# Altium PCB Driver.PcbDoc
Units mil, origin at the board's own origin, x right, y up, seen from the top; angles counter-clockwise.
Board outline 3937.01 x 3937.01 mil, 2 copper layers (Top Layer, Bottom Layer); 110 components, 78 nets, 353 pads, 36 vias.
Unrouted connection lines stored in the file: 162.
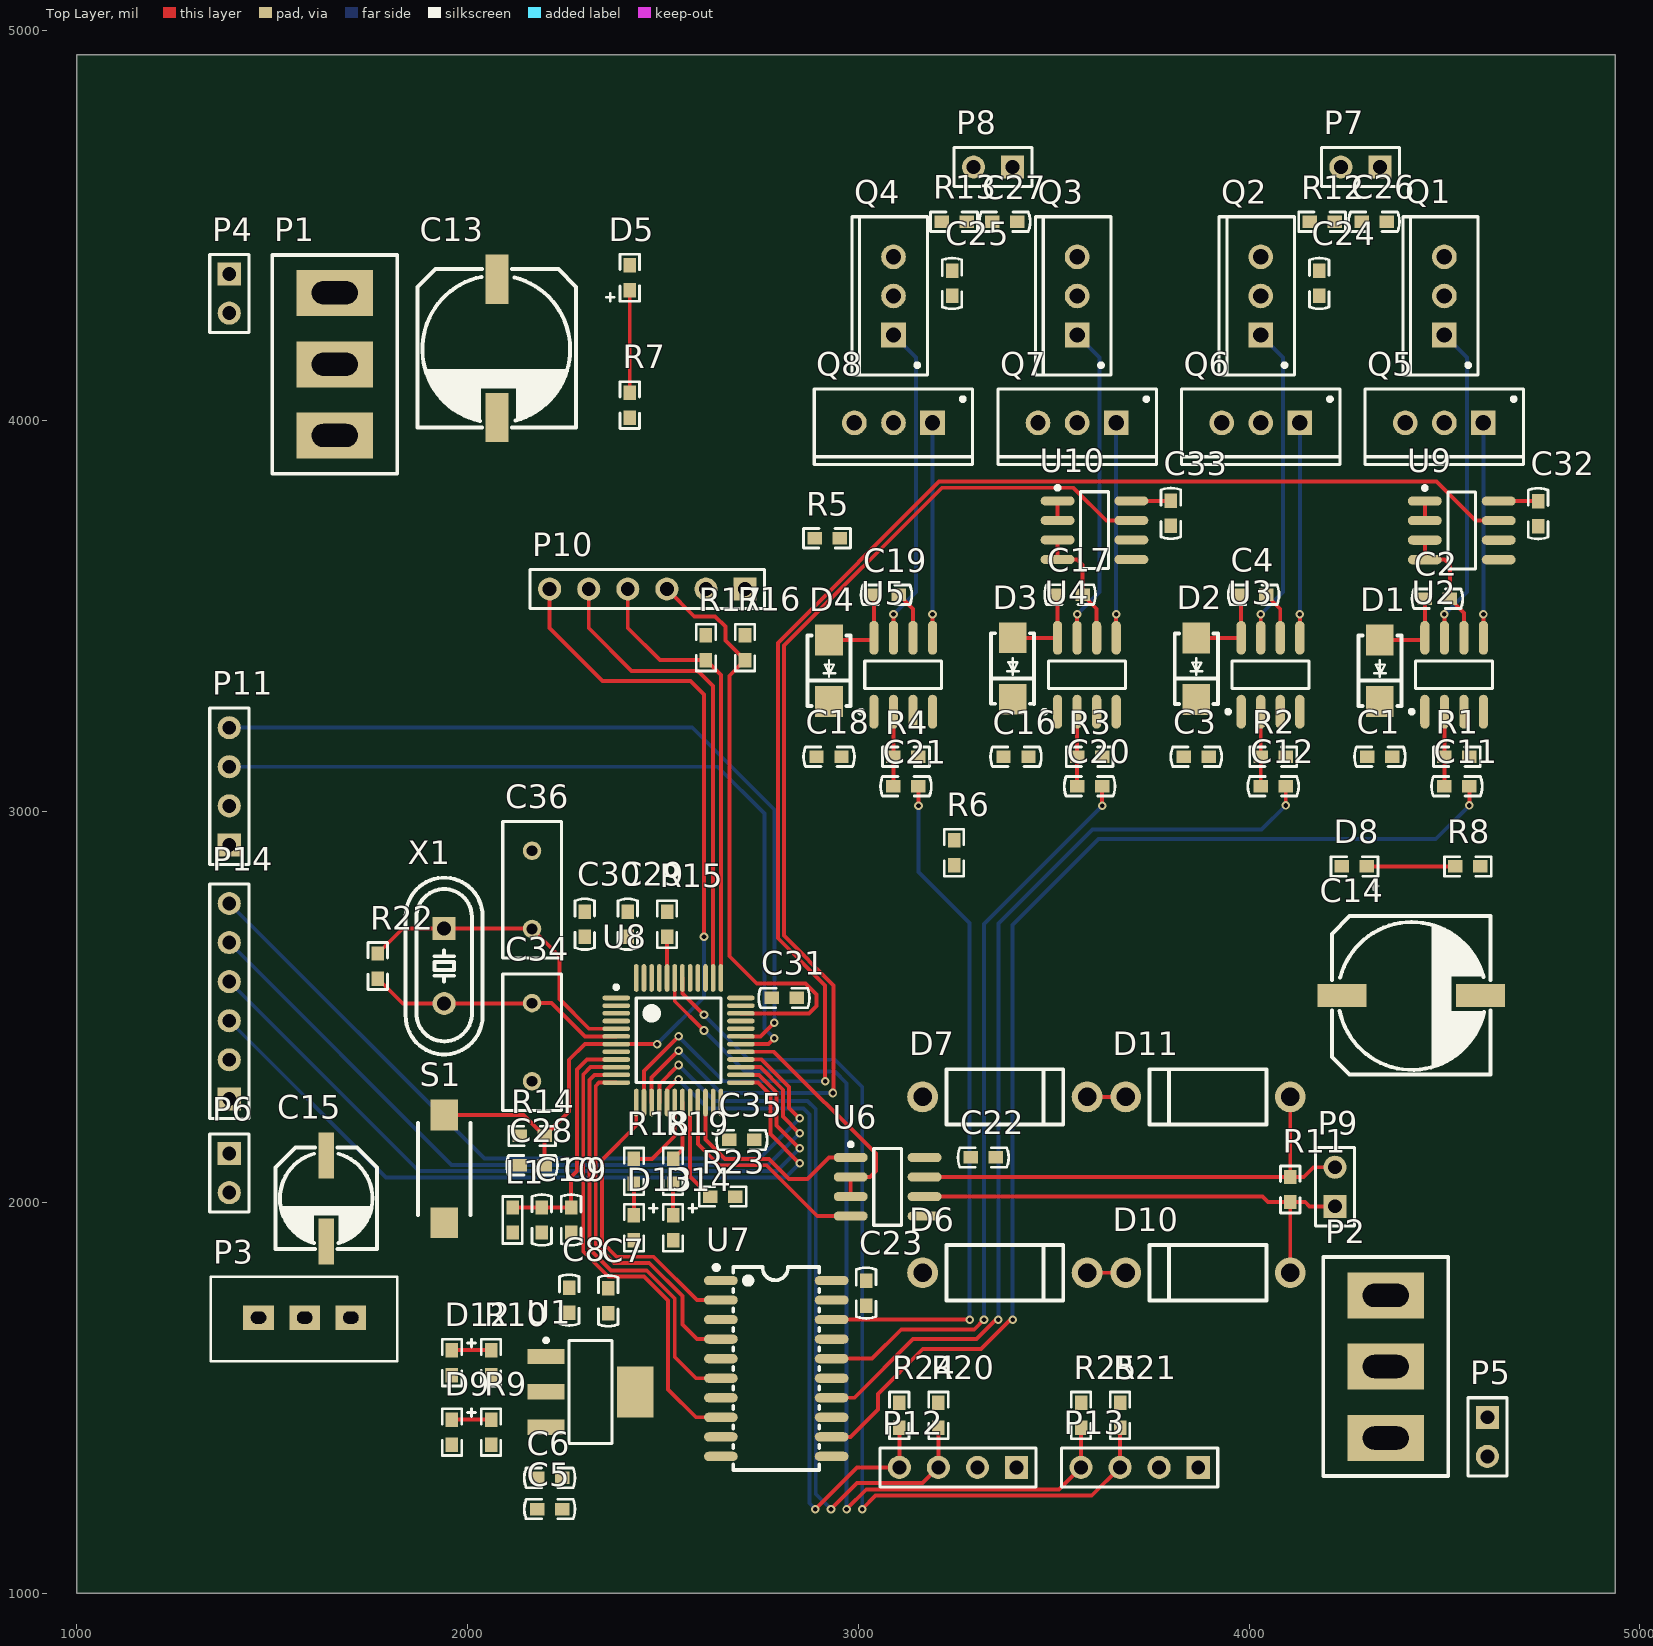
[diagram p0: Top Layer view]
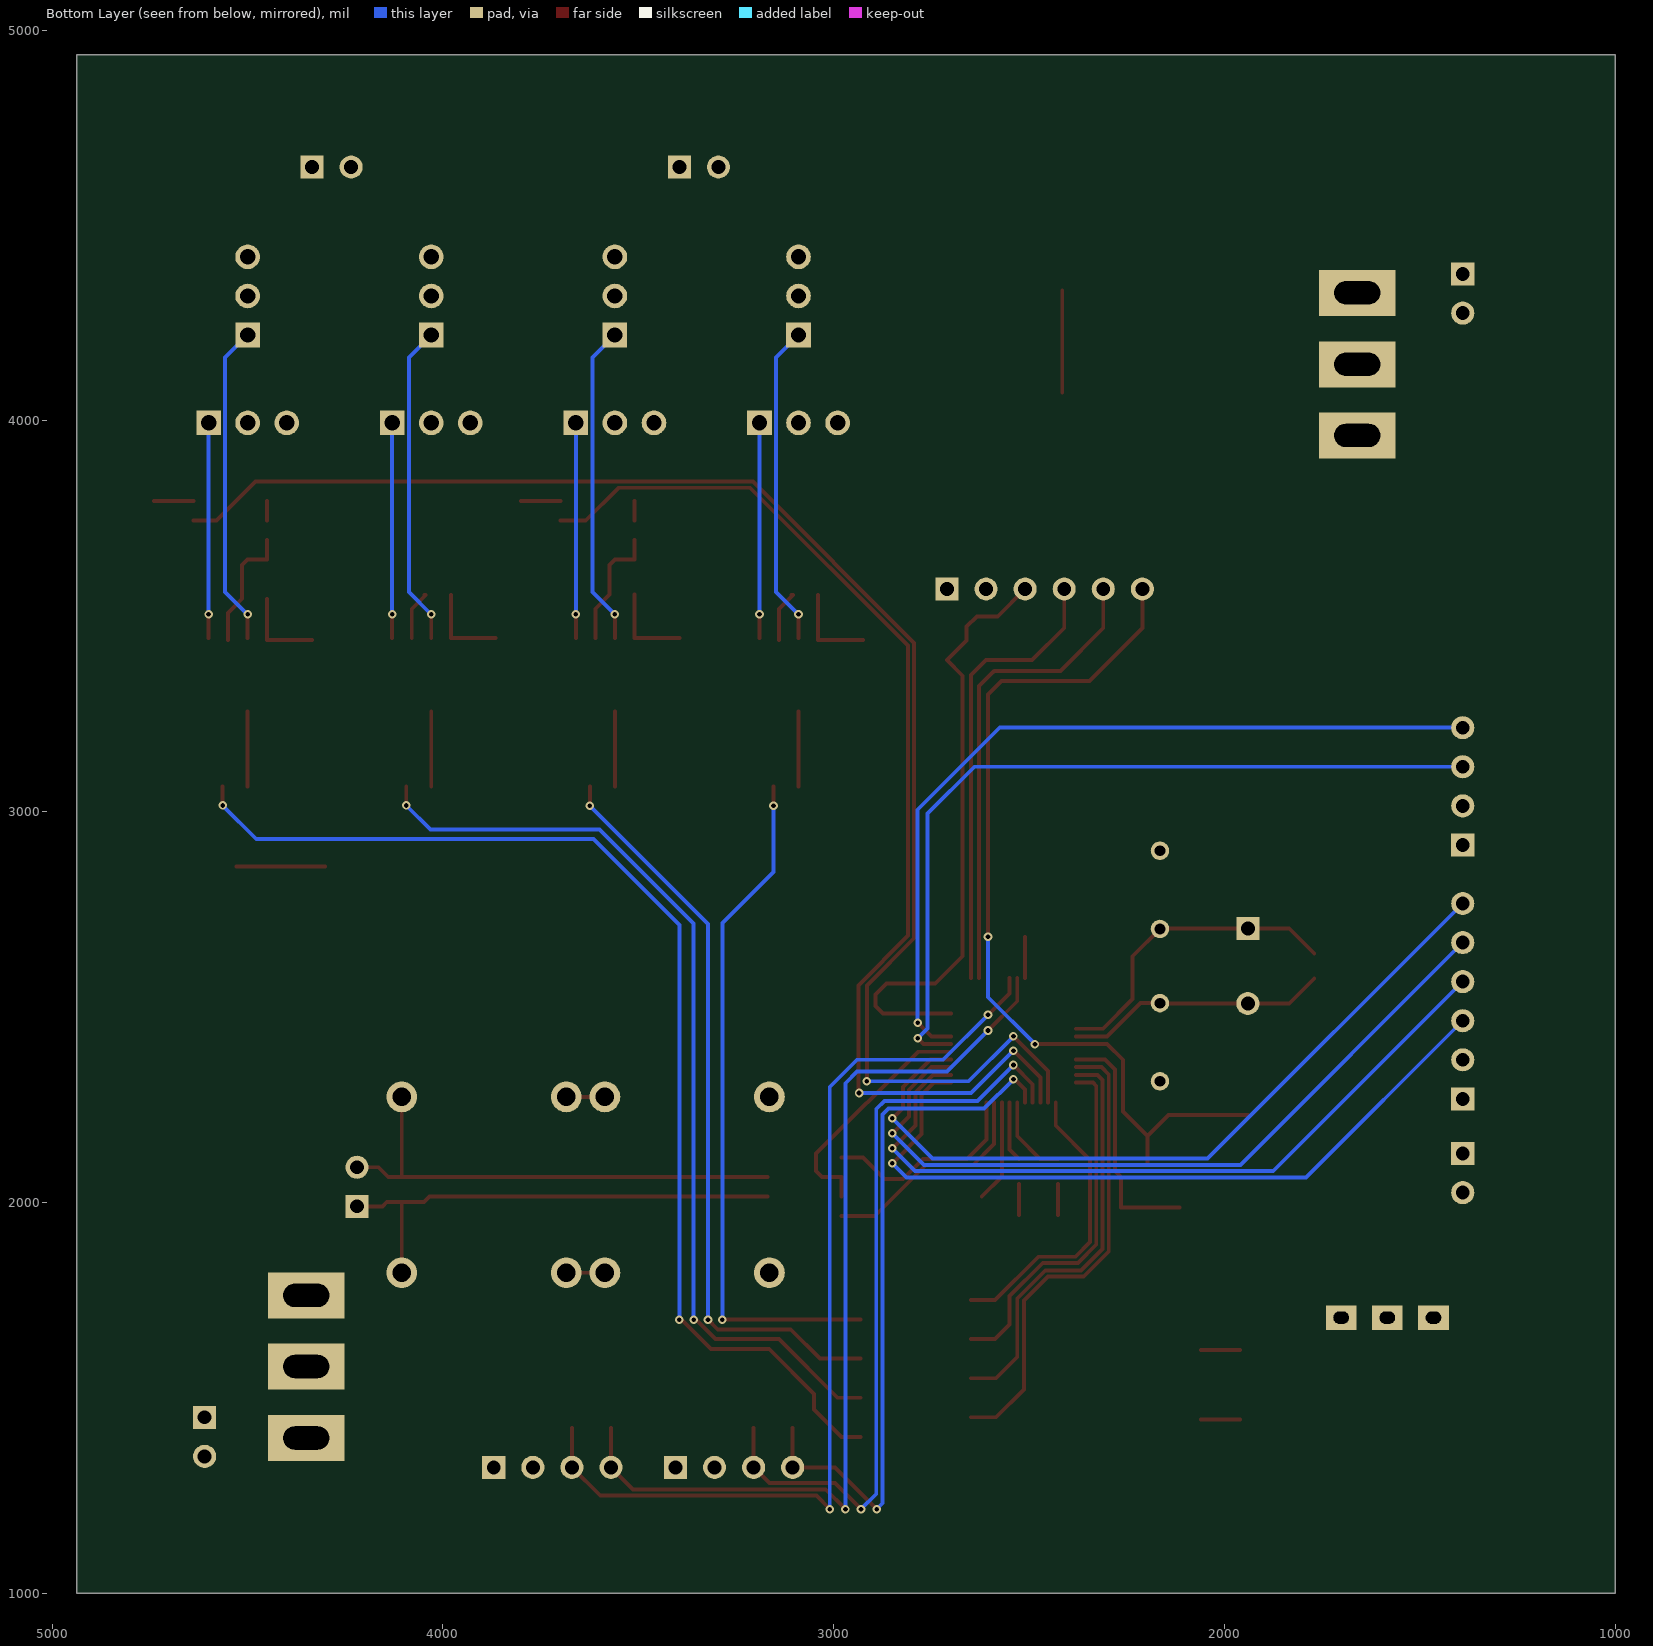
[diagram p1: Bottom Layer view, seen from below]
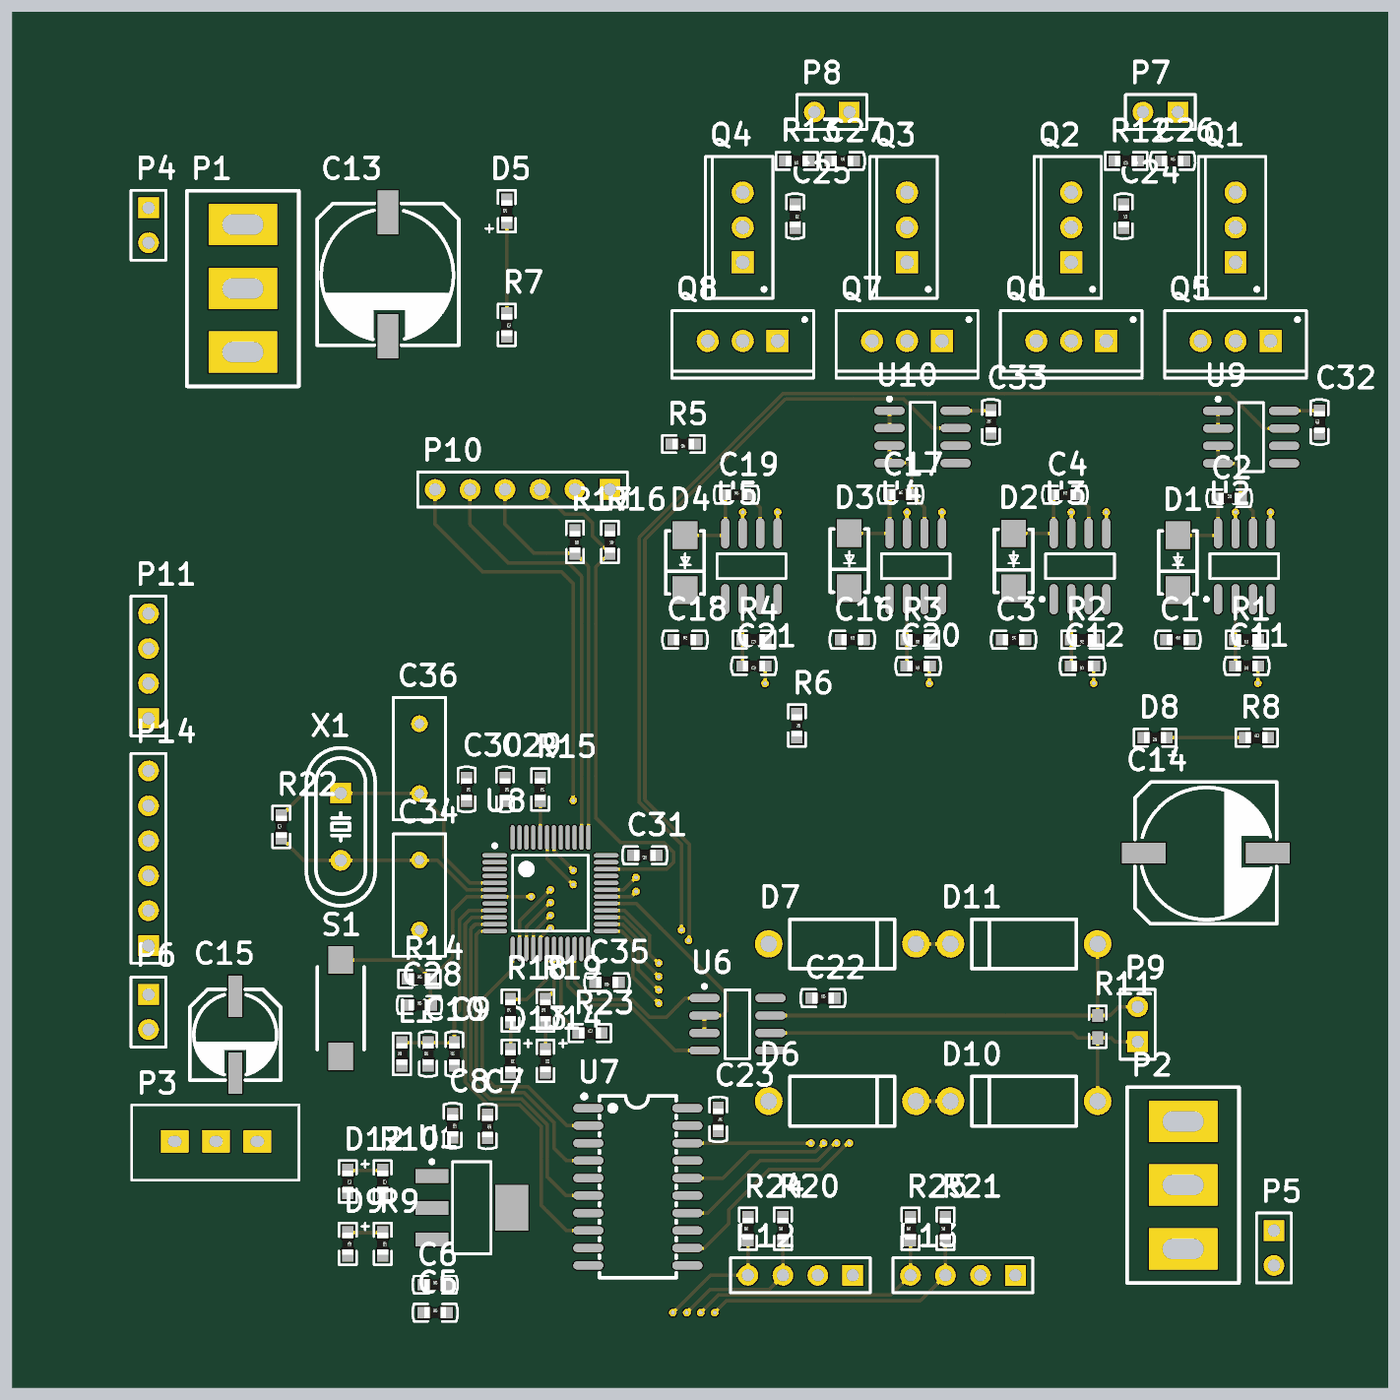
[diagram p2: 3D render of the assembled board from above, using the file's embedded part models]

## Layer stack, top to bottom
Top Solder: solder mask 0.4, Solder Resist, Dk 3.5
Top Layer: signal copper 1.4
Dielectric 1: dielectric 12.6, FR-4, Dk 4.8
Bottom Layer: signal copper 1.4
Bottom Solder: solder mask 0.4, Solder Resist, Dk 3.5

## Board outline
1000,1000 1000,4937.01 4937.01,4937.01 4937.01,1000

## Design rules (kind name [scope] priority, off if disabled: settings)
Clearance [All] p1: gap=6 ignorepadtopadclearanceinfootprint=FALSE except(0: Arc-Hole Track-Hole SMDPad-Hole THPad-Hole Via-Hole Fill-Hole Poly-Hole Region-Hole Text-Hole)
PolygonConnect [All] p1: connectstyle=Relief reliefconductorwidth=10 reliefentries=4 polygonreliefangle="90 Angle" airgapwidth=10
RoutingVias [All] p1: holewidth=28 width=50 viastyle="Through Hole" minholewidth=28 minwidth=50 maxholewidth=28 maxwidth=50
SolderMaskExpansion [All] p1: expansion=4
Width [All] p1: maxlimit=100 minlimit=10 preferedwidth=10 minimp=50.000000 maximp=50.000000 favimp=50.000000
30 further rules are at their usual default settings.

## Components (designator, comment, footprint, x,y, rotation, side; value= is the part's Value field where it differs from the comment)
C1 "0.1μF" 0603C 4335,3140.51 r0 top
C2 "1μF" 0603C 4482,3545 r0 top
C3 "0.1μF" 0603C 3865,3140.51 r0 top
C4 "1μF" 0603C 4012,3555 r0 top
C5 "10μF" 0603C 2210,1215 r0 top
C6 "0.1μF" 0603C 2210,1295 r0 top
C7 "10μF" 0603C 2360,1748 r270 top
C8 "0.1μF" 0603C 2260,1750 r270 top
C9 "0.1μF" 0603C 2265,1955 r90 top
C10 "1μF" 0603C 2190,1955 r90 top
C11 "0.1μF" 0603C 4532,3065 r180 top
C12 "0.1μF" 0603C 4062,3065 r180 top
C13 "220μF 50V" CAP-SMD_BD10.0-L10.3-W10.3-FD 2075,4185.84 r270 top
C14 "220μF 50V" CAP-SMD_BD10.0-L10.3-W10.3-FD 4415,2530 r0 top
C15 "220μF 16V" CAP-SMD_BD6.3-L6.6-W6.6-FD 1638.11,2010.24 r270 top
C16 "0.1μF" 0603C 3403.57,3140.51 r0 top
C17 "1μF" 0603C 3542,3555.52 r0 top
C18 "0.1μF" 0603C 2925,3140.51 r0 top
C19 "1μF" 0603C 3072,3555 r0 top
C20 "0.1μF" 0603C 3592,3065 r180 top
C21 "0.1μF" 0603C 3122,3065 r180 top
C22 "0.1μF" 0603C 3320,2115 r0 top
C23 "100nF" 0603C 3020,1768 r270 top
C24 "1μF" 0603C 4180,4352 r270 top
C25 "1μF" 0603C 3240,4352 r270 top
C26 "0.1μF" 0603C 4320,4510 r0 top
C27 "0.1μF" 0603C 3375,4510 r0 top
C28 "0.1μF" 0603C 2165,2095 r0 top
C29 "0.1μF" 0603C 2410,2712 r270 top
C30 "0.1μF" 0603C 2300,2712 r270 top
C31 "0.1μF" 0603C 2810,2523.27 r180 top
C32 "0.1μF" 0603C 4740,3763 r90 top
C33 "0.1μF" 0603C 3800,3763.51 r90 top
C34 "20nF" RAD-0.2 2165,2410 r270 top
C35 "0.1μF" 0603C 2702,2160 r180 top
C36 "20nF" RAD-0.2 2165,2800 r90 top
D1 "D-SS12" SMA_L4.4-W2.6-LS5.0-RD 4335,3360.75 r90 top
D2 "D-SS12" SMA_L4.4-W2.6-LS5.0-RD 3865,3365.75 r90 top
D3 "D-SS12" SMA_L4.4-W2.6-LS5.0-RD 3395,3366.26 r90 top
D4 "D-SS12" SMA_L4.4-W2.6-LS5.0-RD 2925,3360.75 r90 top
D5 "LED_0603" 0603D 2415,4366.5 r90 top
D6 "P6KE11A" DO-15_BD3.1-L6.7-P10.70-D0.9-FD 3375,1820 r0 top
D7 "P6KE11A" DO-15_BD3.1-L6.7-P10.70-D0.9-FD 3375,2270 r0 top
D8 "LED_0603" 0603D 4269.83,2860 r180 top
D9 "LED_0603" 0603D 1960,1412 r270 top
D10 "P6KE6.8A" DO-15_BD3.1-L6.7-P10.70-D0.9-FD 3895,1820 r180 top
D11 "P6KE6.8A" DO-15_BD3.1-L6.7-P10.70-D0.9-FD 3895,2270 r180 top
D12 "LED_0603" 0603D 1960,1590 r270 top
D13 "LED_0603" 0603D 2425.74,1935.01 r270 top
D14 "LED_0603" 0603D 2525.74,1935.01 r270 top
L1 "Inductor" 0603L 2115,1955 r90 top
P1 "SWITCH36" 钮子开关 1660,4145 r180 top
P2 "SWITCH12" 钮子开关 4350,1580 r0 top
P3 "SWITCH5" SWITCH_SS-12F44 1465,1705 r0 top
P4 "PWR36" HDR1X2 1390,4376.06 r270 top
P5 "PWR12" HDR1X2 4610,1450 r270 top
P6 "PWR5" HDR1X2 1390,2125 r270 top
P7 "MOTOR" HDR1X2 4335,4650 r180 top
P8 "MOTOR" HDR1X2 3395,4650 r180 top
P9 "RS485" HDR1X2 4220,1990 r90 top
P10 "Header 6" HDR1X6 2710,3570 r180 top
P11 "UART" HDR1X4 1390,2915 r90 top
P12 "CODER" HDR1X4 3405,1321.89 r180 top
P13 "CODER" HDR1X4 3870,1321.89 r180 top
P14 "GPIO" HDR1X6 1390,2265 r90 top
Q1 "IRF3205" TO-262-AA 4500,4320 r90 top
Q2 "IRF3205" TO-262-AA 4030,4320 r90 top
Q3 "IRF3205" TO-262-AA 3560,4320 r90 top
Q4 "IRF3205" TO-262-AA 3090,4320 r90 top
Q5 "IRF3205" TO-262-AA 4500,3995 r180 top
Q6 "IRF3205" TO-262-AA 4030,3995 r180 top
Q7 "IRF3205" TO-262-AA 3560,3995 r180 top
Q8 "IRF3205" TO-262-AA 3090,3995 r180 top
R1 "10K" 0603R 4532,3140.51 r180 top
R2 "10K" 0603R 4062,3140.51 r180 top
R3 "10K" 0603R 3592,3140.51 r180 top
R4 "10K" 0603R 3122,3140.51 r180 top
R5 "0Ω" 0603R 2920,3700 r180 top value=10K
R6 "0Ω" 0603R 3245,2895 r270 top value=10K
R7 "10K" 0603R 2415,4040.68 r270 top
R8 "10K" 0603R 4560.16,2860 r0 top
R9 "10K" 0603R 2060,1412 r270 top
R10 "10K" 0603R 2060,1590 r270 top
R11 "100" 0603R 4105.63,2033 r270 top value=10K
R12 "100R" 0603R 4187,4510 r180 top value=10K
R13 "100R" 0603R 3245,4510 r180 top value=10K
R14 "10K" 0603R 2165,2170 r0 top
R15 "10K" 0603R 2510.47,2712 r270 top
R16 "10K" 0603R 2710,3420 r270 top
R17 "10K" 0603R 2610,3420 r270 top
R18 "10K" 0603R 2425.75,2079.26 r90 top
R19 "10K" 0603R 2525.76,2079.26 r90 top
R20 "10K" 0603R 3205,1455 r90 top
R21 "10K" 0603R 3670,1455 r90 top
R22 "1M" 0603R 1770,2605 r90 top value=10K
R23 "10K" 0603R 2653,2015 r0 top
R24 "10K" 0603R 3105,1455 r90 top
R25 "10K" 0603R 3570,1455 r90 top
S1 "SW_PB" SMD_6MM*3MM 1940,2085.76 r270 top
U1 "AS1117-3.3" SOT223_N 2315,1515 r0 top
U2 "IR2104S" SO8_N 4525,3350.51 r90 top
U3 "IR2104S" SO8_N 4055,3350.51 r90 top
U4 "IR2104S" SO8_N 3585,3350.51 r90 top
U5 "IR2104S" SO8_N 3115,3350.51 r90 top
U6 "MAX3485" SO8_N 3075,2040 r0 top
U7 "74HC244" SOIC-20_L13.3-W5.5-P1.27-LS7.8-BL 2790,1575 r270 top
U8 "stm32f103c8t6" STM-LQFP48_N 2540,2415 r0 top
U9 "CC6904SO" SO8_N 4544.49,3720 r0 top
U10 "CC6904SO" SO8_N 3604.49,3720.51 r0 top
X1 "8MHz" HC-49US_L11.5-W4.5-P4.88 1940,2605 r270 top

## Footprints (in the part's own frame and the unit in brackets; to place one, negate y for a bottom-side part, rotate by r counter-clockwise, add the part's x,y. Pads: shape width x height; smd on the part's side, far side on the other; paste and mask are expansions set on the pad)
0603C [mil]
  rect 37x32 smd: 1(-32,0) 2(32,0)
  silkscreen extent -65,-25 65,25, body extent -31,-16 32,16, height 12
0603D [mil]
  rect 37x32 smd: 1(-32,0) 2(32,0)
  silkscreen extent -60,-25 60,60, body extent -31,-16 32,16, height 12
0603L [mil]
  rect 37x32 smd: 1(-32,0) 2(32,0)
  silkscreen extent -60,-25 60,25, body extent -31,-16 32,16, height 12
0603R [mil]
  rect 37x32 smd: 1(-32,0) 2(32,0)
  silkscreen extent -60,-25 60,25, body extent -31,-16 32,16, height 12
CAP-SMD_BD6.3-L6.6-W6.6-FD [mm]
  rect 3x1 smd: 1(-2.8,0) 2(2.8,0)
  silkscreen extent -3.3,-3.3 3.3,3.3
CAP-SMD_BD10.0-L10.3-W10.3-FD [mm]
  rect 3.2x1.5 smd: 1(-4.5,0) 2(4.5,0)
  silkscreen extent -5.15,-5.15 5.15,5.15
DO-15_BD3.1-L6.7-P10.70-D0.9-FD [mm]
  round 2 hole 1.2: 1(-5.35,0) 2(5.35,0)
  silkscreen extent -3.8,-1.8 3.8,1.8
HC-49US_L11.5-W4.5-P4.88 [mm]
  rect 1.5x1.5 hole 0.9: 1(-2.438,0)
  round 1.5 hole 0.9: 2(2.438,0)
  silkscreen extent -5.74,-2.5 5.74,2.5
HDR1X2 [mm] "Connector; Header; 2 Position"
  rect 1.5x1.5 hole 0.9: 1(0,0)
  round 1.5 hole 0.9: 2(2.54,0)
  silkscreen extent -1.27,-1.27 3.81,1.27
HDR1X4 [mm] "Connector; Header; 4 Position"
  rect 1.5x1.5 hole 0.9: 1(0,0)
  round 1.5 hole 0.9: 2(2.54,0) 3(5.08,0) 4(7.62,0)
  silkscreen extent -1.27,-1.27 8.89,1.27
HDR1X6 [mm] "Connector; Header; 6 Position"
  rect 1.5x1.5 hole 0.9: 1(0,0)
  round 1.5 hole 0.9: 2(2.54,0) 3(5.08,0) 4(7.62,0) 5(10.16,0) 6(12.7,0)
  silkscreen extent -1.27,-1.27 13.97,1.27
RAD-0.2 [mm] "Radial Cap, Thru-Hole; 2 Leads; 0.2 in Pin Spacing"
  round 1.2 hole 0.7: 1(-2.54,0) 2(2.54,0)
  silkscreen extent -4.44,-1.91 4.44,1.91
SMA_L4.4-W2.6-LS5.0-RD [mm]
  rect 2x1.8 smd: 1(-2,0) 2(2,0)
  silkscreen extent -2.3,-1.4 2.3,1.4
SMD_6MM*3MM [mm]
  rect 2x1.8 smd: 1(-3.5,0) 2(3.5,0)
  silkscreen extent -3,-1.7 3,1.7
SO8_N [mm] "SOIC, 8-Leads, Body 4.9x3.9mm, Pitch 1.27mm, IPC Medium Density"
  oval 2.2x0.6 smd: 1(-2.4,1.905) 2(-2.4,0.635) 3(-2.4,-0.635) 4(-2.4,-1.905) 5(2.4,-1.905) 6(2.4,-0.635) 7(2.4,0.635) 8(2.4,1.905)
  silkscreen extent -2.52,-2.5 0.9,2.88, body extent -2,-2.5 2,2.5, height 1.75
SOIC-20_L13.3-W5.5-P1.27-LS7.8-BL [mm]
  oval 0.6x2.198 smd: 1(-5.715,-3.6) 2(-4.445,-3.6) 3(-3.175,-3.6) 4(-1.905,-3.6) 5(-0.635,-3.6) 6(0.635,-3.6) 7(1.905,-3.6) 8(3.175,-3.6) 9(4.445,-3.6) 10(5.715,-3.6) 11(5.715,3.6) 12(4.445,3.6) 13(3.175,3.6) 14(1.905,3.6) 15(0.635,3.6) 16(-0.635,3.6) 17(-1.905,3.6) 18(-3.175,3.6) 19(-4.445,3.6) 20(-5.715,3.6)
  silkscreen extent -6.72,-4.05 6.6,2.79
SOT223_N [mm] "SOT223, 4-Leads, Body 6.5x3.5mm, Pitch 2.3mm, Lead Span 7mm, IPC Medium Density"
  rect 2.4x1 smd: 1(-2.9,2.3) 2(-2.9,0) 3(-2.9,-2.3)
  rect 2.4x3.3 smd: 4(2.9,0)
  silkscreen extent -3.02,-3.35 1.4,3.47, body extent -1.85,-3.35 1.85,3.35, height 1.7
STM-LQFP48_N [mm] "QFP, 48-Leads, Body 7x7mm, Pitch 0.5mm, IPC Medium Density"
  oval 1.8x0.3 smd: 1(-4.05,2.75) 2(-4.05,2.25) 3(-4.05,1.75) 4(-4.05,1.25) 5(-4.05,0.75) 6(-4.05,0.25) 7(-4.05,-0.25) 8(-4.05,-0.75) 9(-4.05,-1.25) 10(-4.05,-1.75) 11(-4.05,-2.25) 12(-4.05,-2.75) 25(4.05,-2.75) 26(4.05,-2.25) 27(4.05,-1.75) 28(4.05,-1.25) 29(4.05,-0.75) 30(4.05,-0.25) 31(4.05,0.25) 32(4.05,0.75) 33(4.05,1.25) 34(4.05,1.75) 35(4.05,2.25) 36(4.05,2.75)
  oval 0.3x1.8 smd: 13(-2.75,-4.05) 14(-2.25,-4.05) 15(-1.75,-4.05) 16(-1.25,-4.05) 17(-0.75,-4.05) 18(-0.25,-4.05) 19(0.25,-4.05) 20(0.75,-4.05) 21(1.25,-4.05) 22(1.75,-4.05) 23(2.25,-4.05) 24(2.75,-4.05) 37(2.75,4.05) 38(2.25,4.05) 39(1.75,4.05) 40(1.25,4.05) 41(0.75,4.05) 42(0.25,4.05) 43(-0.25,4.05) 44(-0.75,4.05) 45(-1.25,4.05) 46(-1.75,4.05) 47(-2.25,4.05) 48(-2.75,4.05)
  silkscreen extent -4.17,-2.75 2.75,3.57, body extent -3.5,-3.5 3.5,3.5, height 1.6
SWITCH_SS-12F44 [mm]
  rect 2x1.6 hole 0.8 slot 1 at 0 deg: 1(0,0) 2(3,0) 3(6,0)
  silkscreen extent -3.12,-2.83 9.02,2.67
TO-262-AA [mm] "TO, Thru-Hole, Vertical, Heatsink Mounted; 3 In-Line Leads; Pitch 2.54 mm"
  rect 1.6x1.6 hole 1: 1(-2.54,0)
  round 1.6 hole 1: 2(0,0) 3(2.54,0)
  silkscreen extent -5.15,-2.2 5.15,2.7, body extent -5.2,-2.25 5.2,2.75, height 19.7
钮子开关 [mm]
  rect 5x3 hole 1.5 slot 3 at 0 deg: 1(0,-4.648) 2(0,0) 3(0,4.623)
  silkscreen extent -4.06,-7.11 4.06,7.11

## Part data
C1 C2 C3 C4 C5 C6 C7 C8 C9 C10 C11 C12 C16 C17 C18 C19 C20 C21 C22 C23 C24 C25 C26 C27 C28 C29 C30 C31 C32 C33 C34 C35 C36: library part Cap, "Capacitor", LatestRevisionDate=17-Jul-2002, LatestRevisionNote="Re-released for DXP Platform.", PackageDescription="Radial Cap, Thru-Hole; 2 Leads; 0.3 in Pin Spacing", PackageReference=RAD-0.3, Published=8-Jun-2000, Publisher="Altium Limited"
C13 C14 C15: library part Cap_A, "Capacitor"
D6 D7 D10 D11: library part P6KE68A, BOM_Manufacturer=RUILON, BOM_Manufacturer Part=P6KE68A, BOM_Supplier=LCSC, BOM_Supplier Part=C10195, spicePre=D, spiceSymbolName=P6KE68A
P1 P2 P3: library part "Header 3", "Header, 3-Pin", LatestRevisionDate=17-Jul-2002, LatestRevisionNote="Re-released for DXP Platform.", Publisher="Altium Limited"
P4 P5 P6 P7 P8 P9: library part "Header 2", "Header, 2-Pin", LatestRevisionDate=17-Jul-2002, LatestRevisionNote="Re-released for DXP Platform.", Publisher="Altium Limited"
P10: "Header, 6-Pin", LatestRevisionDate=17-Jul-2002, LatestRevisionNote="Re-released for DXP Platform.", Publisher="Altium Limited"
P11 P12 P13: library part "Header 4", "Header, 4-Pin", LatestRevisionDate=17-Jul-2002, LatestRevisionNote="Re-released for DXP Platform.", Publisher="Altium Limited"
P14: library part "Header 6", "Header, 6-Pin", LatestRevisionDate=17-Jul-2002, LatestRevisionNote="Re-released for DXP Platform.", Publisher="Altium Limited"
R1 R2 R3 R4 R5 R6 R7 R8 R9 R10 R11 R12 R13 R14 R15 R16 R17 R18 R19 R20 R21 R22 R23 R24 R25: library part Res1, "Resistor", LatestRevisionDate=17-Jul-2002, LatestRevisionNote="Re-released for DXP Platform.", PackageDescription="Axial Device, Thru-Hole; 2 Leads; 0.3 in Pin Spacing", PackageReference=AXIAL-0.3, Published=8-Jun-2000, Publisher="Altium Limited"
S1: "SWITCH"
U9 U10: library part CC6902SO
X1: "Crystal", BOM_Manufacturer="ZheJiang East Crystal Elec", BOM_Manufacturer Part=B08000J065, BOM_Supplier=LCSC, BOM_Supplier Part=C258976, Contributor=LCSC, nameAlias=Frequency, spicePre=X, spiceSymbolName=B08000J065
Q1 Q2 Q3 Q4 Q5 Q6 Q7 Q8: Code_JEDEC=TO-220-AB, DatasheetDocument=PD-9.814, LatestRevisionDate=17-Jul-2002, LatestRevisionNote="Re-released for DXP Platform.", Note="Pin 2 is electrically connected to pin 4.", PackageReference=TO-220AB, Published=8-Jun-2000, Publisher="Altium Limited"

## Via types
v1: diameter 22, hole 12, Top Layer to Bottom Layer, 36 vias

## Nets (pads, with @x,y where several pads share a name; then routed paths per layer and width w, separated by ;. In a path a pad name is that pad's centre, name@x,y a point inside that pad or via, vN(x,y) a via of type N, cw(c..) or ccw(c..) an arc to the next point about the centre after c; other vN are vias at no path point)
485DIR: U6.2 U6.3 U8.29 | length 619.1
  Top Layer w10: U8.29 2784.53,2385.47 3045,2125 3045,2080 3030,2065 U6.2 U6.3
ADC12_IN4: U8.14 U9.7 | length 3858.4
  Top Layer w10: U8.14 2451.42,2336.42 v1(2540,2425) ; v1(2915,2310) 2915,2555 2794,2676 2794,3432.14 3206.86,3845 4480,3845 4580,3745 U9.7
  Bottom Layer w10: v1(2540,2425) 2655,2310 v1(2915,2310)
ADC12_IN5: U8.15 U10.7 | length 2890.8
  Top Layer w10: U8.15 2471.1,2319.44 v1(2540,2388.33) ; v1(2935,2280) 2937,2282 2937,2555.63 2810,2682.63 2810,3425.51 3213.49,3829 3551,3829 3634.49,3745.51 U10.7
  Bottom Layer w10: v1(2540,2388.33) 2648.33,2280 v1(2935,2280)
AGND: C32.1 C33.1 R5.1 U9.5 U10.5
DGND: C5.1 C6.1 C7.1 C8.1 C9.1 C10.1 C14.1 C15.1 C22.2 C28.1 C29.1 C30.1 C31.1 C34.2 C35.1 C36.2 D6.1 D7.1 D8.2 D9.2 D12.2 D13.2 D14.2 P5.1 P6.1 P10.2 P11.1 P12.1 P13.1 P14.1 R5.2 R6.2 R15.1 R23.2 S1.2 U1.1 U6.5 U7.1 U7.3 U7.5 U7.7 U7.9 U7.10 U8.8 U8.23 U8.35 U8.47
IN1+: Q1.3 Q5.2 U9.1 U9.2 | length 50
  Top Layer w10: U9.2 U9.1
IN1-: C2.2 C26.2 P7.1 U2.6 U9.3 U9.4 | length 326.2
  Top Layer w10: U9.3 U9.4 4500,3645 4514,3631 C2.2 4550,3509 U2.6@4550,3439.49
IN2+: Q3.3 Q7.2 U10.1 U10.2 | length 50
  Top Layer w10: U10.2 U10.1
IN2-: C17.2 C27.2 P8.1 U4.6 U10.3 U10.4 | length 321.2
  Top Layer w10: U10.3 U10.4 3560,3645.51 3574,3631.51 C17.2 3610,3519.52 U4.6
LED1: R18.2 U8.18 | length 214.3
  Top Layer w10: R18.2 2471.47,2111.26 2530.16,2169.95 U8.18
LED2: R19.2 U8.19 | length 154.3
  Top Layer w10: R19.2 2549.84,2135.34 U8.19
MOS_1H: Q1.1 U2.7 | length 822.6
  Top Layer w10: U2.7 v1(4500,3505)
  Bottom Layer w10: v1(4500,3505) 4557.5,3562.5 4557.5,4162.5 Q1.1
MOS_1L: Q5.1 U2.5 | length 550
  Top Layer w10: U2.5 v1(4600,3505)
  Bottom Layer w10: v1(4600,3505) Q5.1
MOS_2H: Q2.1 U3.7 | length 822.6
  Top Layer w10: U3.7 v1(4030,3505)
  Bottom Layer w10: v1(4030,3505) 4087.5,3562.51 4087.5,4162.5 Q2.1
MOS_2L: Q6.1 U3.5 | length 550
  Top Layer w10: U3.5 v1(4130,3505)
  Bottom Layer w10: v1(4130,3505) Q6.1
MOS_3H: Q3.1 U4.7 | length 822.6
  Top Layer w10: U4.7 v1(3560,3505)
  Bottom Layer w10: v1(3560,3505) 3617.5,3562.5 3617.5,4162.5 Q3.1
MOS_3L: Q7.1 U4.5 | length 550
  Top Layer w10: U4.5 v1(3660,3505)
  Bottom Layer w10: v1(3660,3505) Q7.1
MOS_4H: Q4.1 U5.7 | length 822.6
  Top Layer w10: U5.7 v1(3090,3505)
  Bottom Layer w10: v1(3090,3505) 3147.5,3562.5 3147.5,4162.5 Q4.1
MOS_4L: Q8.1 U5.5 | length 550
  Top Layer w10: U5.5 v1(3190,3505)
  Bottom Layer w10: v1(3190,3505) Q8.1
MOTOR2: C4.2 P7.2 Q2.3 Q6.2 R12.2 U3.6 | length 129.4
  Top Layer w10: C4.2@4048,3555 C4.2 4080,3519 U3.6@4080,3444.49
MOTOR4: C19.2 P8.2 Q4.3 Q8.2 R13.2 U5.6 | length 134.4
  Top Layer w10: C19.2@3108,3555 C19.2 3140,3519 U5.6@3140,3439.49
NetC2_1: C2.1 D1.2 U2.8 | length 220.5
  Top Layer w10: D1.2 4450,3439.49 C2.1
NetC4_1: C4.1 D2.2 U3.8 | length 225.5
  Top Layer w10: D2.2 3980,3444.49 C4.1
NetC11_2: C11.2 R1.2 U2.2 | length 191
  Top Layer w10: C11.2 R1.2 U2.2
NetC12_2: C12.2 R2.2 U3.2 | length 191
  Top Layer w10: C12.2 R2.2 U3.2
NetC17_1: C17.1 D3.2 U4.8 | length 225.5
  Top Layer w10: D3.2 U4.8 C17.1
NetC19_1: C19.1 D4.2 U5.8 | length 230.5
  Top Layer w10: D4.2 3040,3439.49 C19.1
NetC20_2: C20.2 R3.2 U4.2 | length 191
  Top Layer w10: C20.2 R3.2 U4.2
NetC21_2: C21.2 R4.2 U5.2 | length 191
  Top Layer w10: C21.2 R4.2 U5.2
NetC26_1: C26.1 R12.1
NetC27_1: C27.1 R13.1
NetD5_1: D5.1 R7.1 | length 261.8
  Top Layer w10: R7.1 D5.1
NetD6_2: D6.2 D10.2 | length 98.7
  Top Layer w10: D6.2 D10.2
NetD7_2: D7.2 D11.2 | length 98.7
  Top Layer w10: D7.2 D11.2
NetD8_1: D8.1 R8.1 | length 226.3
  Top Layer w10: D8.1 R8.1
NetD9_1: D9.1 R9.1 | length 100
  Top Layer w10: D9.1 R9.1
NetD12_1: D12.1 R10.1 | length 100
  Top Layer w10: D12.1 R10.1
NetD13_1: D13.1 R18.1 | length 80.3
  Top Layer w10: D13.1@2425.75,1967.02 R18.1
NetD14_1: D14.1 R19.1 | length 80.3
  Top Layer w10: D14.1@2525.76,1967.02 R19.1
NetP1_1: P1.1 P1.2 P4.2
NetP2_1: P2.1 P2.2 P5.2
NetP3_1: P3.1 P3.2 P6.2
NetR15_2: R15.2 U8.44 | length 105.6
  Top Layer w10: U8.44 R15.2
NetR23_1: R23.1 U8.20 | length 261.9
  Top Layer w10: U8.20 2569.53,2066.47 R23.1
NRST: C28.2 P10.6 R14.2 S1.1 U8.7 | length 2326.9
  Top Layer w10: S1.1 2143.44,2223.56 R14.2 ; C28.2 R14.2 ; P10.6 2210,3470 2345,3335 2570,3335 2605,3300 v1(2605,2680) ; v1(2485,2405.16) U8.7 2300.16,2405.16 2260,2365 2260,2233 R14.2
  Bottom Layer w10: v1(2485,2405.16) 2605,2525.16 v1(2605,2680)
"OSC IN": C36.1 R22.2 U8.5 X1.1 | length 807.6
  Top Layer w10: R22.2 1834,2701 X1.1 2164,2701 C36.1 2235,2630 2235,2520.16 2310.63,2444.53 U8.5
"OSC OUT": C34.1 R22.1 U8.6 X1.2 | length 672.7
  Top Layer w10: R22.1 1834,2509 X1.2 2164,2509 C34.1 2215,2510 2300.16,2424.84 U8.6
PA15: P10.5 U8.38 | length 1227.1
  Top Layer w10: P10.5 2310,3470 2420,3360 2587.95,3360 2589.44,3358.5 2591.5,3358.5 2628.58,3321.42 U8.38
PB12: P14.3 U8.25 | length 1935.8
  Top Layer w10: U8.25 2743.27,2306.73 2775,2275 2775,2175 v1(2850,2100)
  Bottom Layer w10: P14.3 1791,2064 2814,2064 v1(2850,2100)
PB13: P14.4 U8.26 | length 1962.9
  Top Layer w10: U8.26 2746.21,2326.42 2791,2281.63 2791,2197.33 v1(2850,2138.33)
  Bottom Layer w10: P14.4 1875,2080 2791.67,2080 v1(2850,2138.33)
PB14: P14.5 U8.27 | length 1990
  Top Layer w10: U8.27 2749.15,2346.1 2807,2288.25 2807,2219.67 v1(2850,2176.67)
  Bottom Layer w10: P14.5 1959,2096 2769.33,2096 v1(2850,2176.67)
PB15: P14.6 U8.28 | length 2017.1
  Top Layer w10: U8.28 2752.09,2365.79 2823,2294.88 2823,2242 v1(2850,2215)
  Bottom Layer w10: P14.6 2043,2112 2747,2112 v1(2850,2215)
PGND: C1.1 C3.1 C13.1 C16.1 C18.1 C23.2 C24.1 C25.1 D5.2 P4.1 Q5.3 Q6.3 Q7.3 Q8.3 R1.1 R2.1 R3.1 R4.1 R6.1 U2.4 U3.4 U4.4 U5.4 U7.11 U7.13 U7.15 U7.17 U7.19
PWM1: C11.1 U7.12 | length 2965.7
  Top Layer w10: U7.12 2980,1400 3050,1470 3050,1510 3165,1625 3314.45,1625 3389.45,1700 v1(3395,1700) ; v1(4564,3016) C11.1
  Bottom Layer w10: v1(3395,1700) 3395,2710 3615,2930 4478,2930 v1(4564,3016)
PWM2: C12.1 U7.14 | length 2432.8
  Top Layer w10: U7.14 2990,1500 3140,1650 3302.78,1650 3352.78,1700 v1(3358.33,1700) ; v1(4094,3016) C12.1
  Bottom Layer w10: v1(3358.33,1700) 3358.33,2713.33 3599,2954 4032,2954 v1(4094,3016)
PWM3: C20.1 U7.16 | length 1921.6
  Top Layer w10: U7.16 3035,1600 3110,1675 3296.67,1675 v1(3321.67,1700) ; v1(3624,3015) C20.1
  Bottom Layer w10: v1(3321.67,1700) 3321.67,2712.67 v1(3624,3015)
PWM4: C21.1 U7.18 | length 1772.5
  Top Layer w10: U7.18 v1(3285,1700) ; v1(3154,3015) C21.1
  Bottom Layer w10: v1(3154,3015) 3154,2846 3285,2715 v1(3285,1700)
PWM_1: U7.8 U8.10 | length 1206.7
  Top Layer w10: U8.10 2315,2346.1 2296,2327.1 2296,1874 2360,1810 2452,1810 2513,1749 2513,1521.53 2584.53,1450 U7.8
PWM_2: U7.6 U8.11 | length 1067.9
  Top Layer w10: U8.11 2325,2326.42 2312,2313.42 2312,1880.63 2366.63,1826 2458.63,1826 2530.16,1754.47 2530.16,1604.37 2584.53,1550 U7.6
PWM_3: U7.4 U8.12 | length 925.4
  Top Layer w10: U8.12 2336.73,2306.73 2328,2298 2328,1892 2375,1845 2465,1845 2549.84,1760.16 2549.84,1687.16 2587,1650 U7.4
PWM_4: U7.2 U8.13 | length 759.1
  Top Layer w10: U8.13 2431.73,2196.73 2344,2109 2344,1898.63 2381.63,1861 2476,1861 2587,1750 U7.2
RS485A: D10.1 P9.1 R11.2 U6.6 | length 1241.9
  Top Layer w10: U6.6 4035,2015 4049,2001 R11.2 ; D10.1 R11.2 ; P9.1 4155,1990 4144,2001 R11.2
RS485B: D11.1 P9.2 R11.1 U6.7 | length 1265.9
  Top Layer w10: U6.7 R11.1 ; D11.1 R11.1 ; P9.2 4165,2090 4140,2065 R11.1
SWCLK: P10.4 R17.2 U8.37 | length 1163.4
  Top Layer w10: P10.4 2410,3470 2492,3388 R17.2 2648.27,3349.73 U8.37
SWDIO: P10.3 R16.2 U8.34 | length 1564.9
  Top Layer w10: P10.3 2580,3500 2633.58,3500 2660,3473.58 2660,3438 R16.2 2670,3348 2670,2630 2740,2560 2865,2560 2893,2532 2893,2503 2873.9,2483.9 U8.34
TIM3_CH1: P12.3 R20.1 U8.16 | length 1974.7
  Top Layer w10: U8.16 2490.79,2302.45 v1(2540,2351.67) ; v1(2930,1215) 2996.36,1281.36 3164.47,1281.36 P12.3 R20.1
  Bottom Layer w10: v1(2540,2351.67) 2631.67,2260 2870,2260 2891,2239 2891,1254 v1(2930,1215)
TIM3_CH2: P12.4 R24.1 U8.17 | length 1822.8
  Top Layer w10: U8.17 2510.47,2289.3 2536.17,2315 v1(2540,2315) ; v1(2890,1215) 2996.89,1321.89 P12.4 R24.1
  Bottom Layer w10: v1(2540,2315) 2615,2240 2860,2240 2875,2225 2875,1230 v1(2890,1215)
TIM4_CH1: P13.3 R21.1 U8.42 | length 2484.3
  Top Layer w10: U8.42 2549.84,2535.16 v1(2605,2480) ; v1(3010,1215) 3044.36,1249.36 3597.47,1249.36 P13.3 R21.1
  Bottom Layer w10: v1(2605,2480) 2720,2365 2940,2365 3010,2295 v1(3010,1215)
TIM4_CH2: P13.4 R25.1 U8.43 | length 2421.8
  Top Layer w10: U8.43 2530.16,2514.84 v1(2605,2440) ; v1(2970,1215) 3020.36,1265.36 3513.47,1265.36 P13.4 R25.1
  Bottom Layer w10: v1(2605,2440) 2710,2335 2940,2335 2970,2305 v1(2970,1215)
USART1_RX: P11.4 U8.31 | length 2127.1
  Top Layer w10: U8.31 2749.84,2424.84 v1(2785,2460)
  Bottom Layer w10: P11.4 2575,3215 2785,3005 v1(2785,2460)
USART1_TX: P11.3 U8.30 | length 2096.8
  Top Layer w10: U8.30 2770.16,2405.16 v1(2785,2420)
  Bottom Layer w10: P11.3 2640,3115 2760,2995 2760,2445 v1(2785,2420)
USART3_RX: U6.1 U8.22 | length 530.7
  Top Layer w10: U8.22 2608.9,2161.1 2659,2111 2771.63,2111 2822.63,2060 2870,2060 2925,2115 U6.1
USART3_TX: U6.4 U8.21 | length 573.6
  Top Layer w10: U8.21 2589.21,2149.79 2644,2095 2765,2095 2895,1965 U6.4
VCC3.3: C7.2 C8.2 C22.1 C29.2 C30.2 C31.2 C32.2 C33.2 C35.2 L1.1 P10.1 P11.2 P14.2 R10.2 R14.1 R16.1 R17.1 R20.2 R21.2 R24.2 R25.2 U1.2 U2.3 U3.3 U4.3 U5.3 U6.8 U8.1 U8.24 U8.36 U8.48 U9.8 U10.8 | length 202
  Top Layer w10: U10.8 C33.2 ; U9.8 C32.2
VCC5: C5.2 C6.2 C15.2 C23.1 P3.3 R9.2 U1.3 U7.20
VCC12: C1.2 C3.2 C14.2 C16.2 C18.2 D1.1 D2.1 D3.1 D4.1 P2.3 P12.2 P13.2 R8.2 U2.1 U3.1 U4.1 U5.1
VCC36: C13.2 C24.2 C25.2 P1.3 Q1.2 Q2.2 Q3.2 Q4.2 R7.2
VDDA: C9.2 C10.2 L1.2 U8.9 | length 620.4
  Top Layer w10: L1.2 C10.2 C9.2 2265,2065 2280,2080 2280,2340 2305.79,2365.79 U8.9
pads on no net: U1.4 U8.2 U8.3 U8.4 U8.32 U8.33 U8.39 U8.40 U8.41 U8.45 U8.46 U9.6 U10.6

## Silkscreen, mask and mechanical layers (free items; w line width, h text height)
Mechanical 1:
  the board outline again, w7